# Altium PCB LaptopPower_RevA.PcbDoc
Units mil, origin at the board's own origin, x right, y up, seen from the top; angles counter-clockwise.
Board outline 4594.88 x 3020.08 mil, 2 copper layers (Top Layer, Bottom Layer); 51 components, 26 nets, 141 pads, 40 vias.
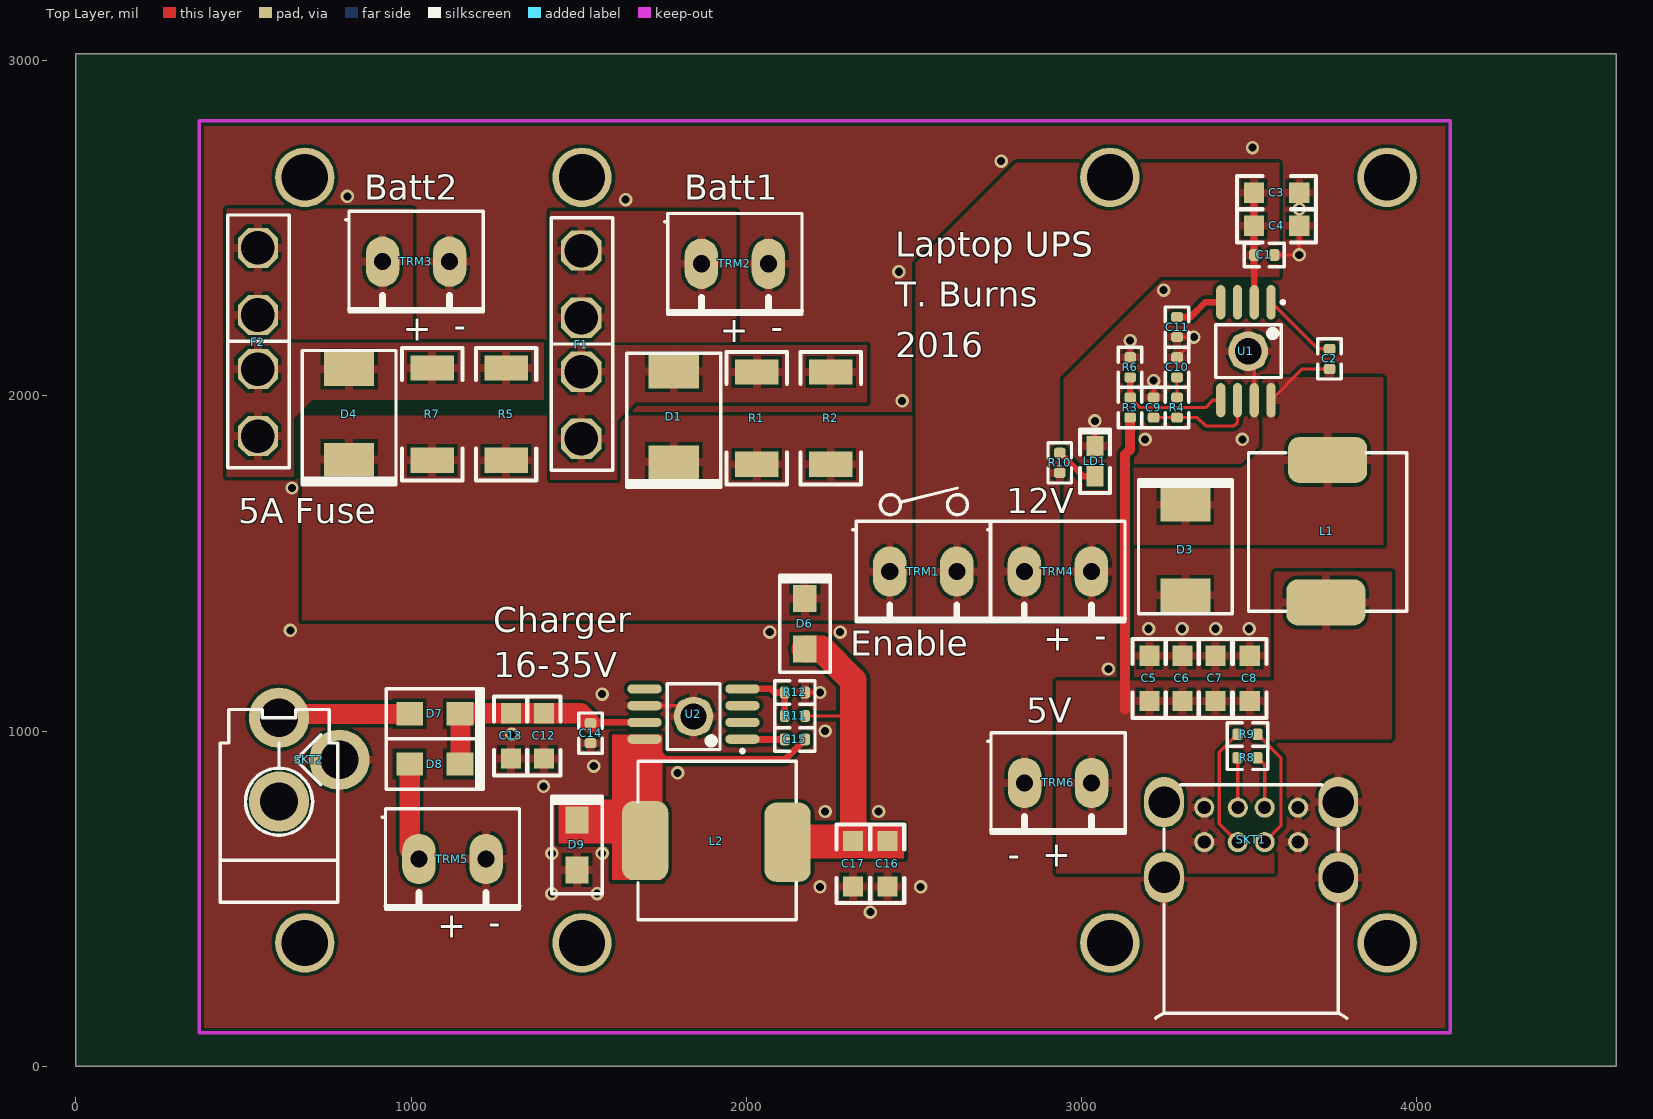
[diagram p0: Top Layer view]
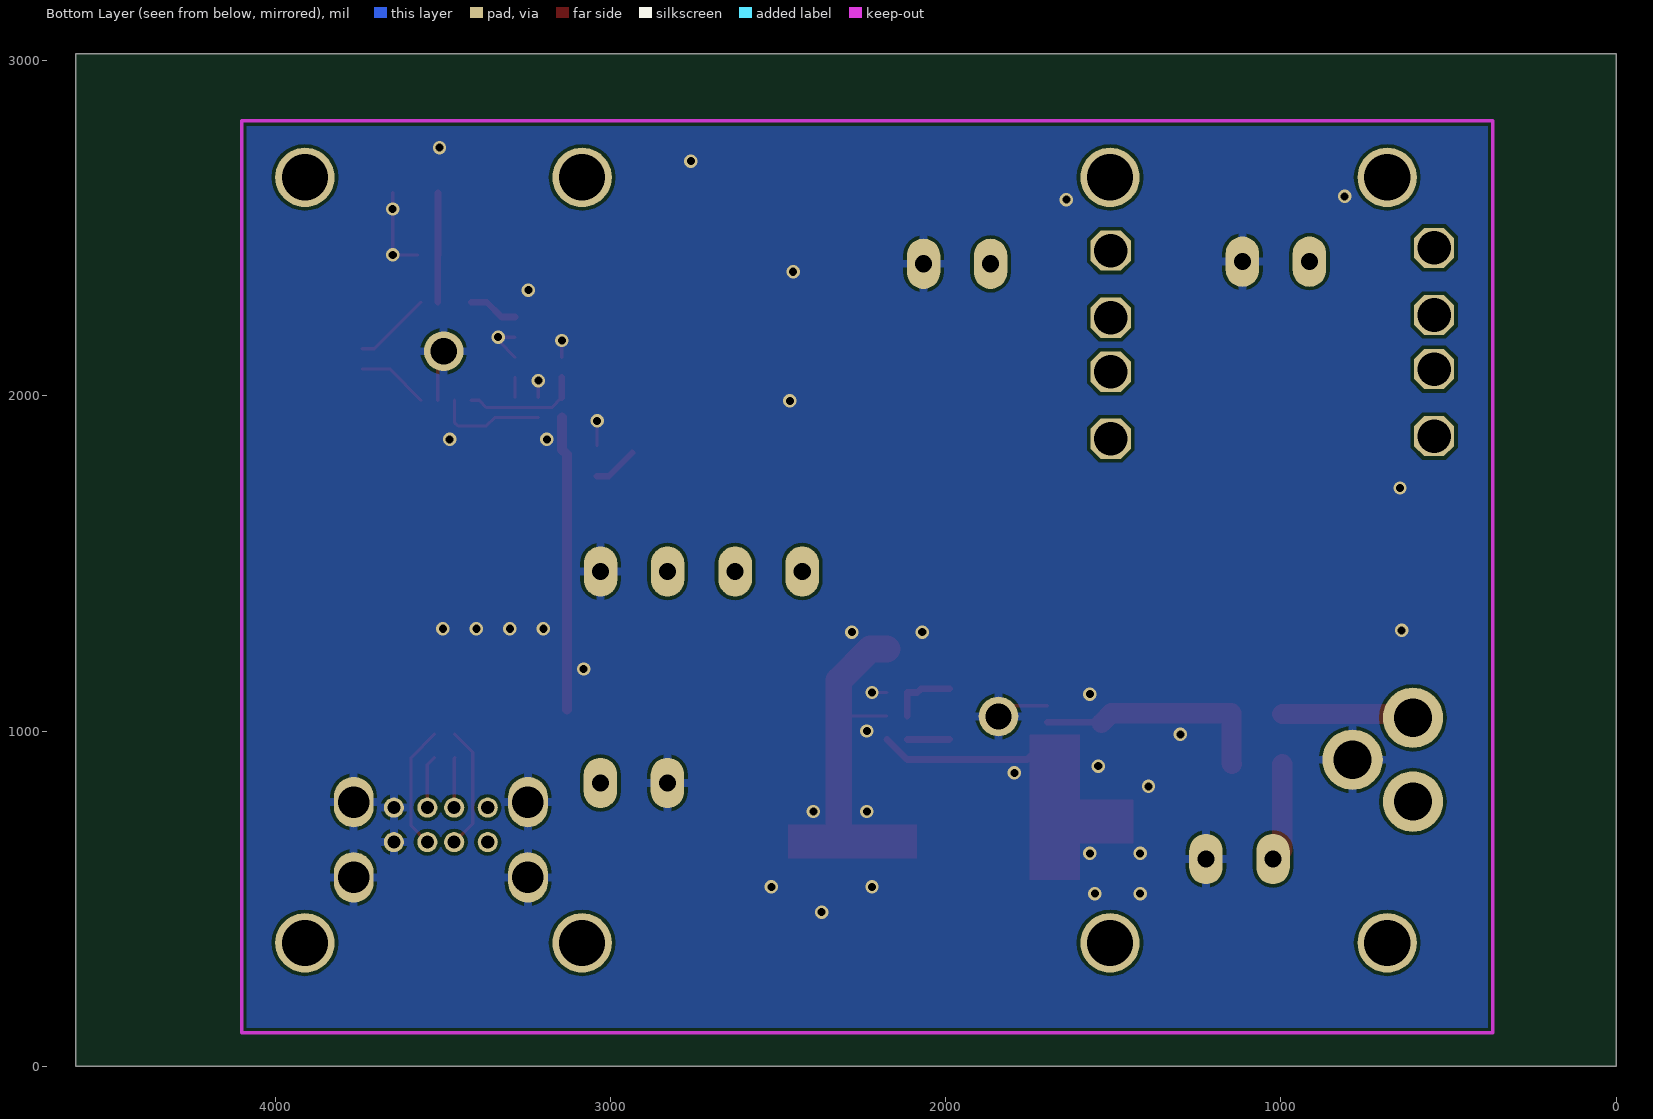
[diagram p1: Bottom Layer view, seen from below]

## Layer stack, top to bottom
Top Layer: signal copper 1.4
Dielectric: dielectric 12.6, FR-4, Dk 4.8
Bottom Layer: signal copper 1.4

## Board outline
0,0 4594.88,0 4594.88,3020.08 0,3020.08

## Design rules (kind name [scope] priority, off if disabled: settings)
Clearance [All] p1: gap=10
HoleSize [All] p1: absolutevalues=TRUE maxlimit=300 minlimit=24 maxpercent=80.000 minpercent=20.000
MinimumAnnularRing [All] p1: minimumring=8
PolygonConnect isVia [isVia] p1: connectstyle=Direct reliefconductorwidth=10 reliefentries=4 polygonreliefangle="90 Angle"
PolygonConnect [All] p2: connectstyle=Relief reliefconductorwidth=25 reliefentries=4 polygonreliefangle="90 Angle"
RoutingVias [All] p1: holewidth=28 width=50 viastyle="Through Hole" minholewidth=28 minwidth=50 maxholewidth=28 maxwidth=50
SolderMaskExpansion [All] p1: expansion=4
TestPointUsage FabricationTestPointUsage [All] p1: valid=0 allowmultiple=FALSE
Testpoint FabricationTestpoint [(IsPad And (OnTopLayer Or OnBottomLayer))] p1: side=3 testpointundercomponent=TRUE minsize=40 maxsize=100 preferedsize=60 minholesize=0 maxholesize=40 preferedholesize=32 testpointgrid=1 style=297 order=0123456789
Width [All] p1: maxlimit=1000 minlimit=10 preferedwidth=10
18 further rules are at their usual default settings.

## Components (designator, comment, footprint, x,y, rotation, side; value= is the part's Value field where it differs from the comment)
C1 "10NF 50V" 0603 3515,2420 r0 top
C2 "100nF 50V" 0603 3740,2140 r270 top
C3 "10UF 25V" 1206 3514.45,2605.55 r0 top
C4 "10UF 25V" 1206 3514.45,2507.13 r0 top
C5 "10UF 25V" 1206 3202.44,1089.53 r90 top
C6 "10UF 25V" 1206 3300.87,1089.53 r90 top
C7 "10UF 25V" 1206 3399.29,1089.53 r90 top
C8 "10UF 25V" 1206 3501.65,1089.53 r90 top
C9 "22PF 100V" 0603 3215,1935 r90 top
C10 "1nF 50V" 0603 3285,2055 r90 top
C11 "10NF 50V" 0603 3285,2235 r270 top
C12 "10UF 25V" 1206 1396.3,1052.99 r270 top
C13 "10UF 25V" 1206 1297.87,1052.99 r270 top
C14 "100nF 50V" 0603 1535.43,1023.62 r270 top
C15 "10NF 50V" 0603 2115,975 r0 top
C16 "10UF 25V" 1206 2421.18,671.5 r270 top
C17 "10UF 25V" 1206 2318.83,671.5 r270 top
D1 "DIODE_SSC54" DO-214AB 1783.46,1937.01 r90 top
D3 "DIODE_SSC54" DO-214AB 3310,1540 r270 top
D4 "DIODE_SSC54" DO-214AB 814.96,1944.88 r90 top
D6 "DIODE_SS14" DO-214AC 2175,1245 r270 top
D7 "DIODE_SS14" DO-214AC 996.06,1051.18 r180 top
D8 "DIODE_SS14" DO-214AC 996.06,901.57 r180 top
D9 "DIODE_SS14" DO-214AC 1495,585 r270 top
F1 "BLADE FUSE" FUSEHOLDER_BLADE 1507.87,2433.07 r270 top
F2 "BLADE FUSE" FUSEHOLDER_BLADE 543.31,2440.94 r270 top
L1 "4.7uH 6A2" Wurth744771156 3733.94,1593.54 r180 top
L2 "56uH 2A" Wurth744771156 1913.39,673.23 r270 top
LD1 "Green LED 0805" 0805DIODE 3040,1850 r270 top
R1 "20R 5%" 2512 2031.5,2070.87 r270 top
R2 "20R 5%" 2512 2251.97,2070.87 r270 top
R3 "10K2 1%" 0603 3145,1995 r270 top
R4 "45K3R 1%" 0603 3285,1995 r270 top
R5 "20R 5%" 2512 1283.46,2082.68 r270 top
R6 "1K96 1%" 0603 3145,2055 r90 top
R7 "20R 5%" 2512 1062.99,2082.68 r270 top
R8 "220R 1%" 0603 3525,920 r180 top
R9 "220R 1%" 0603 3525,990 r180 top
R10 "2K2 1%" 0603 2935,1830 r270 top
R11 "1K 1%" 0603 2115,1045 r0 top
R12 "590R 1%" 0603 2175,1115 r180 top
SKT1 "USB A Double Socket" USB_A_DoubleSocket 3366.14,771.65 r270 top
SKT2 "DC Socket" SKT_PWR 606.3,1039.37 r90 top
TRM1 "Wurth 2way screw terminal" TERM_2POS_HORIZ_5.08MM 2427.99,1475.83 r0 top
TRM2 "Wurth 2way screw terminal" TERM_2POS_HORIZ_5.08MM 1866.14,2393.7 r0 top
TRM3 "Wurth 2way screw terminal" TERM_2POS_HORIZ_5.08MM 915,2400 r0 top
TRM4 "Wurth 2way screw terminal" TERM_2POS_HORIZ_5.08MM 2829.57,1475.83 r0 top
TRM5 "Wurth 2way screw terminal" TERM_2POS_HORIZ_5.08MM 1023.62,618.11 r0 top
TRM6 "Wurth 2way screw terminal" TERM_2POS_HORIZ_5.08MM 2830,845 r0 top
U1 "TPS54531DDA" PSOP-8 3497.72,2132.91 r270 top
U2 "Buck Reg" PSOP-8 1842.52,1043.31 r180 top

## Footprints (in the part's own frame and the unit in brackets; to place one, negate y for a bottom-side part, rotate by r counter-clockwise, add the part's x,y. Pads: shape width x height; smd on the part's side, far side on the other; paste and mask are expansions set on the pad)
0603 [mil]
  rrect50% 30x35 smd: 1(0,0) 2(60,0)
  silkscreen extent -30,-35 90,35
0805DIODE [mil]
  rect 60x50 smd: A(90,0) K(0,0)
  silkscreen extent -50,-45 140,45
1206 [mil]
  rect 60x60 smd: 1(0,0) 2(135,0)
  silkscreen extent -50,-50 185,50
2512 [mil]
  rect 75x130 smd: 1(0,0) 2(275,0)
  silkscreen extent -60,-90 335,90
DO-214AB [mil]
  rect 100x150 smd: A(135,0) K(-135,0)
  silkscreen extent -210,-140 190,140
DO-214AC [mil]
  rect 80x70 smd: A(0,0) K(-150,0)
  silkscreen extent -220,-75 70,75
FUSEHOLDER_BLADE [mil]
  oct 120x120 hole 100: 1(0,0) 1(200,0) 2(361.22,0) 2(561.22,0)
  silkscreen extent -98,-90 656,94
PSOP-8 [mm]
  oval 2.6x0.7 smd: 1(-3.711,1.717) 2(-3.711,0.447) 3(-3.711,-0.823) 4(-3.711,-2.093) 5(3.711,-2.093) 6(3.711,-0.823) 7(3.711,0.447) 8(3.711,1.717)
  rrect50% 2.6x2.6 smd: 9(0,0)
  silkscreen extent -3.84,-2.47 1.99,2.74
SKT_PWR [mil]
  round 180 hole 114: COM(-250,0) PIN(0,0) SW(-125,-180)
  silkscreen extent -550,-175 25,175
TERM_2POS_HORIZ_5.08MM [mil]
  oval 100x150 hole 51: 1(0,0) 2(200,0)
  silkscreen extent -110,-150 300,150
USB_A_DoubleSocket [mil]
  round 60 hole 39: 1(0,0) 2(0,100) 3(0,180) 4(0,280) 5(103.15,0) 6(103.15,100) 7(103.15,180) 8(103.15,280)
  oval 150x118.11 hole 94: 9(208.15,-120) 10(-16.26,-120) 11(-16.26,400) 12(208.15,400)
  silkscreen extent -68,-145 628,425
Wurth744771156 [mm]
  rrect50% 6x3.5 smd: 1(0,-5.461) 2(0.127,5.334)
  silkscreen extent -6.01,-6.01 5.99,5.99

## Part data
C1 C11 C15: library part CAP_10NF_50V_10%_0603, "CAP CER 10NF 50V 10% X7R 0603"
C2 C14: library part CAP_100NF_50V_10%_0603, "CAP CER 100nF 50V 10% X7R 0603"
C3 C4 C5 C6 C7 C8 C12 C13 C16 C17: library part CAP_10UF_25V_10%_1206, "CAP CER 10UF 25V 10% X5R 1206"
C9: library part CAP_22PF_100V_5%_0603, "CAP CER 22PF 100V 5% NP0 0603"
C10: library part CAP_1NF_50V_10%_0603, "CAP CER 1nF 50V 10% X7R 0603"
D1 D3 D4: "Schottky Diode, 5A, 40V SSC54, DO214AB"
D6 D7 D8 D9: "Schottky Diode, 1A, 40V SS14"
F1 F2: library part FUSE_BLADE_500V_30A_PCB, "FUSE CLIP BLADE 500V 30A PCB"
L1: library part IND_4.7uH_6A2, "FIXED IND 4.7UH 6.2A 34 MOHM"
L2: library part IND_56uH_2.01A, "FIXED IND 56UH 2.01A 110 MOHM"
LD1: library part LED_Green_0805, "WL-SMCW SMD CHIP LED WATERCLEAR"
R1 R2 R5 R7: library part RES_20R_5%_2512, "Resistor, 20R, 5%, 2512"
R3: library part RES_10K2_1%_0603, "Resistor, 10K2, 1%, 0603"
R4: library part RES_45K3_1%_0603, "Resistor, 45K3, 1%, 0603"
R6: library part RES_1K96_1%_0603, "Resistor, 1K96, 1%, 0603"
R8 R9: library part RES_220R_1%_0603, "Resistor, 220R, 1%, 0603"
R10: library part RES_2K2_1%_0603, "Resistor, 2K2, 1%, 0603"
R11: library part RES_1K_1%_0603, "Resistor, 1K, 1%, 0603"
R12: library part RES_590R_1%_0603, "Resistor, 590R, 1%, 0603"
SKT1: library part USB_A_Double
SKT2: library part SOCKET_DC
TRM1 TRM2 TRM3 TRM4 TRM5 TRM6: library part TRM_2way_ScrewTerminal, "TERM BLOCK 2POS HORIZ 5.08MM T/H"
U1: library part IC_SMPS_TPS54531, "SMPS"
U2: library part IC_REG_LM22675, "IC REG BUCK 5V 1A 8SOPWRPAD"

## Free pads (board coordinates)
  round 177.17 hole 137.8: 0(683.07,368.11) 0(683.07,2651.57) 0(1509.84,368.11) 0(1509.84,2651.57) 0(3084.65,368.11) 0(3084.65,2651.57) 0(3911.42,368.11) 0(3911.42,2651.57)
  round 118.11 hole 78.74: 0(1842.52,1043.31) 0(3497.72,2132.91)

## Via types
v1: diameter 40, hole 24, Top Layer to Bottom Layer, tented both sides, 40 vias

## Nets (pads, with @x,y where several pads share a name; then routed paths per layer and width w, separated by ;. In a path a pad name is that pad's centre, name@x,y a point inside that pad or via, vN(x,y) a via of type N, cw(c..) or ccw(c..) an arc to the next point about the centre after c; other vN are vias at no path point)
5V: C5.1 C6.1 C7.1 C8.1 L1.2 R3.2 SKT1.1 SKT1.5 TRM6.2 | length 876.2
  Top Layer w30: 3130,1065 3130,1825 3145,1840 R3.2
B1: F1.1 TRM2.1
B2: F2.1 TRM3.1
CHG-FB: R11.1 R12.2 U2.4 | length 200.8
  Top Layer w20: U2.4 2074.28,1125.72 2085,1115 R12.2 R11.1
CHG-IN: C12.1 C13.1 C14.1 D7.K D8.K U2.7 | length 713.7
  Top Layer w20: C14.1 1537.53,1025.72 U2.7
  Top Layer w60: D8.K 1147.87,903.39 1147.87,1052.99 C13.1 C12.1 1506.06,1052.99 C14.1
GND: C1.2 C3.2 C4.2 C5.2 C6.2 C7.2 C8.2 C9.2 C10.2 C11.2 C12.2 C13.2 C14.2 C16.2 C17.2 D3.A D9.A LD1.K pad.0@1842.52,1043.31 pad.0@3497.72,2132.91 R6.2 R12.1 SKT1.4 SKT1.8 SKT1.9 SKT1.10 SKT1.11 SKT1.12 SKT2.SW TRM2.2 TRM3.2 TRM4.2 TRM5.2 TRM6.1 U1.7 U1.9 U2.6 U2.9 | length 924.4
  Top Layer w10: U2.6 1810.11,1075.72 U2.9 ; R12.1 v1(2220,1115) ; LD1.K v1(3040,1925) ; R6.2 v1(3145,2165) ; C9.2 v1(3215,2045) ; C10.2 3335,2165 v1(3335,2175) C11.2 ; U1.9 3515.3,2115.33 U1.7 ; C1.2 3650,2420 v1(3649.45,2420.55) C4.2 C3.2
  other v1: 2370,460 1420,515 1555,515 2220,535 2520,535 1420,635 1570,635 2235,760 2395,760 1395,835 1795,875 1545,895 1300,990 2235,1000 1570,1110 3080,1185 2070,1295 2280,1295 640,1300 3200,1305 3300,1305 3400,1305 3500,1305 645,1725 3190,1870 3480,1870 2465,1985 3245,2315 2455,2370 3650,2557.13 1640,2585 810,2595 2760,2700 3510,2740
NetC2_1: C2.1 U1.1 | length 232.3
  Top Layer w10: U1.1 3704.32,2140 C2.1
NetC2_2: C2.2 D3.K L1.1 U1.8 | length 213.3
  Top Layer w10: U1.8 3658.49,2080 C2.2
NetC9_1: C9.1 R4.2 U1.6 | length 331.4
  Top Layer w10: C9.1 R4.2 3345.66,1935 3370.66,1910 3455,1910 3465.3,1920.3 U1.6
NetC10_1: C10.1 R4.1 | length 60
  Top Layer w10: R4.1 C10.1
NetC11_1: C11.1 U1.4 | length 148.5
  Top Layer w20: C11.1 3325,2235 3369.02,2279.02 U1.4
NetC15_1: C15.1 U2.1 | length 126.7
  Top Layer w20: U2.1 1989.34,975 C15.1
NetC15_2: C15.2 D9.K L2.1 U2.8 | length 528.6
  Top Layer w20: U2.8 1757.14,915 2115,915 C15.2
NetD1_A: D1.A F1.2 R1.1 R2.1
NetD4_A: D4.A F2.2 R5.1 R7.1
NetD7_A: D7.A SKT2.PIN | length 394.7
  Top Layer w60: SKT2.PIN 618.11,1051.18 D7.A
NetD8_A: D8.A TRM5.1 | length 294.9
  Top Layer w60: D8.A 996.06,645.67 TRM5.1
NetLD1_A: LD1.A R10.1 | length 134
  Top Layer w20: R10.1 3005,1760 LD1.A
NetR3_1: R3.1 R6.1 U1.5 | length 351.8
  Top Layer w10: R3.1 3175,1965 3370,1965 3391.81,1986.81 U1.5
  Top Layer w20: R3.1 R6.1
NetR8_1: R8.1 SKT1.3 | length 157.1
  Top Layer w10: R8.1 3546.14,898.86 SKT1.3
NetR8_2: R8.2 SKT1.2 | length 148.8
  Top Layer w10: R8.2 3466.14,918.86 SKT1.2
NetR9_1: R9.1 SKT1.7 | length 370.7
  Top Layer w10: R9.1 3595,920 3595,717.36 SKT1.7
NetR9_2: R9.2 SKT1.6 | length 366.6
  Top Layer w10: R9.2 3411.14,936.14 3411.14,723.5 SKT1.6
VCC-CHG: C16.1 C17.1 D6.A L2.2 R11.2 | length 801.2
  Top Layer w10: R11.2 2313.83,1045
  Top Layer w80: D6.A 2225,1245 2318.83,1151.17 C17.1
VCC_12V: C1.1 C3.1 C4.1 R10.2 TRM1.2 TRM4.1 U1.2 | length 326.9
  Top Layer w20: C3.1 C4.1 3514.45,2420.55 C1.1 3515,2279.32 U1.2
VCC_BATT: D1.K D4.K D6.K R1.2 R2.2 R5.2 R7.2 TRM1.1
pads on no net: SKT2.COM U1.3 U2.2 U2.3 U2.5

## Polygon pours and split planes (outlines as drawn)
5V on Top Layer "5V" (solid, remove dead copper, pour order 2): 3575,1150 3575,575 2925,575 2925,1150
VCC_12V on Top Layer "VCC-12V" (solid, remove dead copper, pour order 8): 2505,1330 2935,1330 2935,2055 3235,2355 3515,2355 3590,2355 3590,2695 3155,2695 2805,2695 2740,2630 2505,2395 2505,1845
NetD1_A on Top Layer "B1-CHG" (solid, remove dead copper, pour order 10): 1415,2150 1415,1750 1615,1750 1615,1925 1670,1980 2320,1980 2340,1980 2360,1980 2360,2150
NetD4_A on Top Layer "B2-CHG" (solid, remove dead copper, pour order 12): 450.43,2157.87 450.43,1757.87 650.43,1757.87 650.43,1932.87 705.43,1987.87 1355.43,1987.87 1375.43,1987.87 1395.43,1987.87 1395.43,2157.87
B1 on Top Layer "B1" (solid, remove dead copper, pour order 16): 1970,2550 1970,2150 1415,2150 1415,2550
B2 on Top Layer "B2" (solid, remove dead copper, pour order 18): 1005.43,2557.87 1005.43,2157.87 450.43,2157.87 450.43,2557.87
VCC_BATT on Top Layer "VCC-CHG" (solid, remove dead copper, pour order 14): 2505,1330 2505,1940 1340,1940 795,1940 675,1940 675,1330
5V on Top Layer "5V" (solid, remove dead copper, pour order 6): 3575,1475 3575,975 3925,975 3925,1475
GND on Top Layer "GND" (solid, remove dead copper, pour order 20): 367.72,100 4100,100 4100,2820 367.72,2820
NetC2_2 on Top Layer "SMPS" (solid, remove dead copper, pour order 0): 3540,2054.61 3540,1845 3500,1805 3480,1785 3150,1785 3150,1555 3900,1555 3900,2055
GND on Bottom Layer "GND" (solid, remove dead copper, pour order 22): 367.72,100 4100,100 4100,2820 367.72,2820

## Keep-outs
Keep-Out Layer:
  lines w10: 367.72,100 4100,100 4100,2820 367.72,2820 367.72,100

## Other copper
Top Layer:
  rectangle net NetC15_2: 1600,555 1750,990
  rectangle net NetC15_2: 1440,665 1685,795
  rectangle net VCC-CHG: 2085,620 2471.18,721.5

## Silkscreen, mask and mechanical layers (free items; w line width, h text height)
Top Overlay:
  circle w10: c2430,1675 r30
  circle w10: c2630,1675 r30
  lines w10: 2459.41,1682.35 2630,1725
  text "Batt2" at 860,2585 h75
  text "Batt1" at 1815,2585 h75
  text "Laptop UPS" at 2445,2415 h75
  text "T. Burns" at 2445,2265 h75
  text "-  +" at 1165,2230 h75 r180
  text "-  +" at 2110,2225 h75 r180
  text "2016" at 2445,2115 h75
  text "12V" at 2775,1650 h75
  text "5A Fuse" at 485,1620 h75
  text "-  +" at 3075,1305 h75 r180
  text "Charger" at 1245,1295 h75
  text "Enable" at 2310,1225 h75
  text "16-35V" at 1245,1160 h75
  text "5V" at 2835,1025 h75
  text "-  +" at 2780,595 h75
  text "-  +" at 1267.48,449.41 h75 r180
Mechanical 1:
  lines w10: 367.72,100 4100,100 4100,2820 367.72,2820 367.72,100
Mechanical 3:
  circle w39.37: c407.48,1509.84 r78.74
  circle w39.37: c683.07,2651.57 r78.74
  circle w39.37: c1509.84,2651.57 r78.74
  circle w39.37: c3084.65,2651.57 r78.74
  circle w39.37: c3911.42,2651.57 r78.74
  circle w39.37: c4187.01,1509.84 r78.74
  circle w39.37: c3911.42,368.11 r78.74
  circle w39.37: c3084.65,368.11 r78.74
  circle w39.37: c1509.84,368.11 r78.74
  circle w39.37: c683.07,368.11 r78.74

## Dimensions
367.72,100 to 367.72,2820 on Mechanical 2
367.72,2820 to 4100,2820 on Mechanical 2